# Altium PCB LISC-XC95144XL.PcbDoc
Units mm, origin at the board's own origin, x right, y up, seen from the top; angles counter-clockwise.
Board outline 60 x 50 mm, 2 copper layers (Top Layer, Bottom Layer); 53 components, 82 nets, 315 pads, 102 vias.
Unrouted connection lines stored in the file: 1.
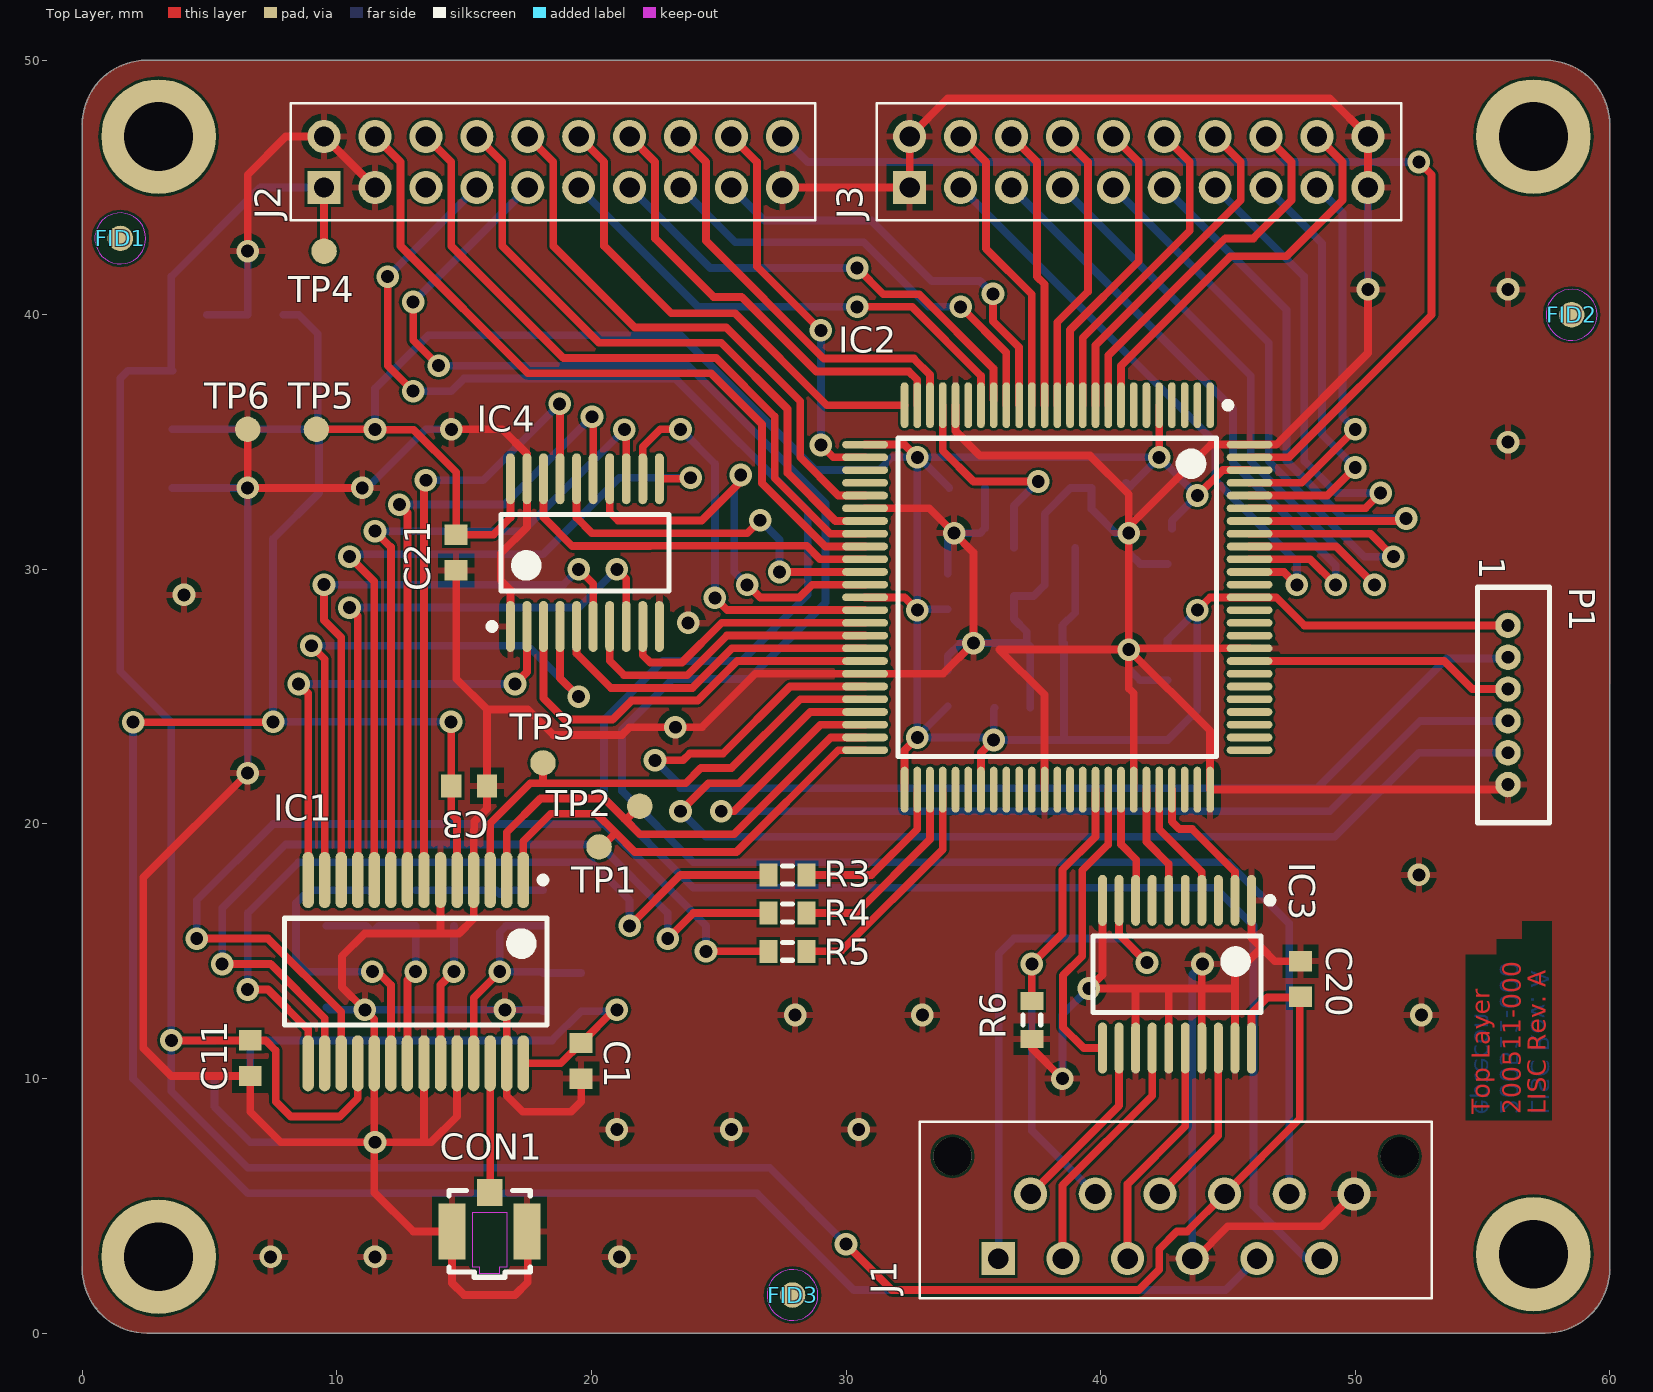
[diagram p0: Top Layer view]
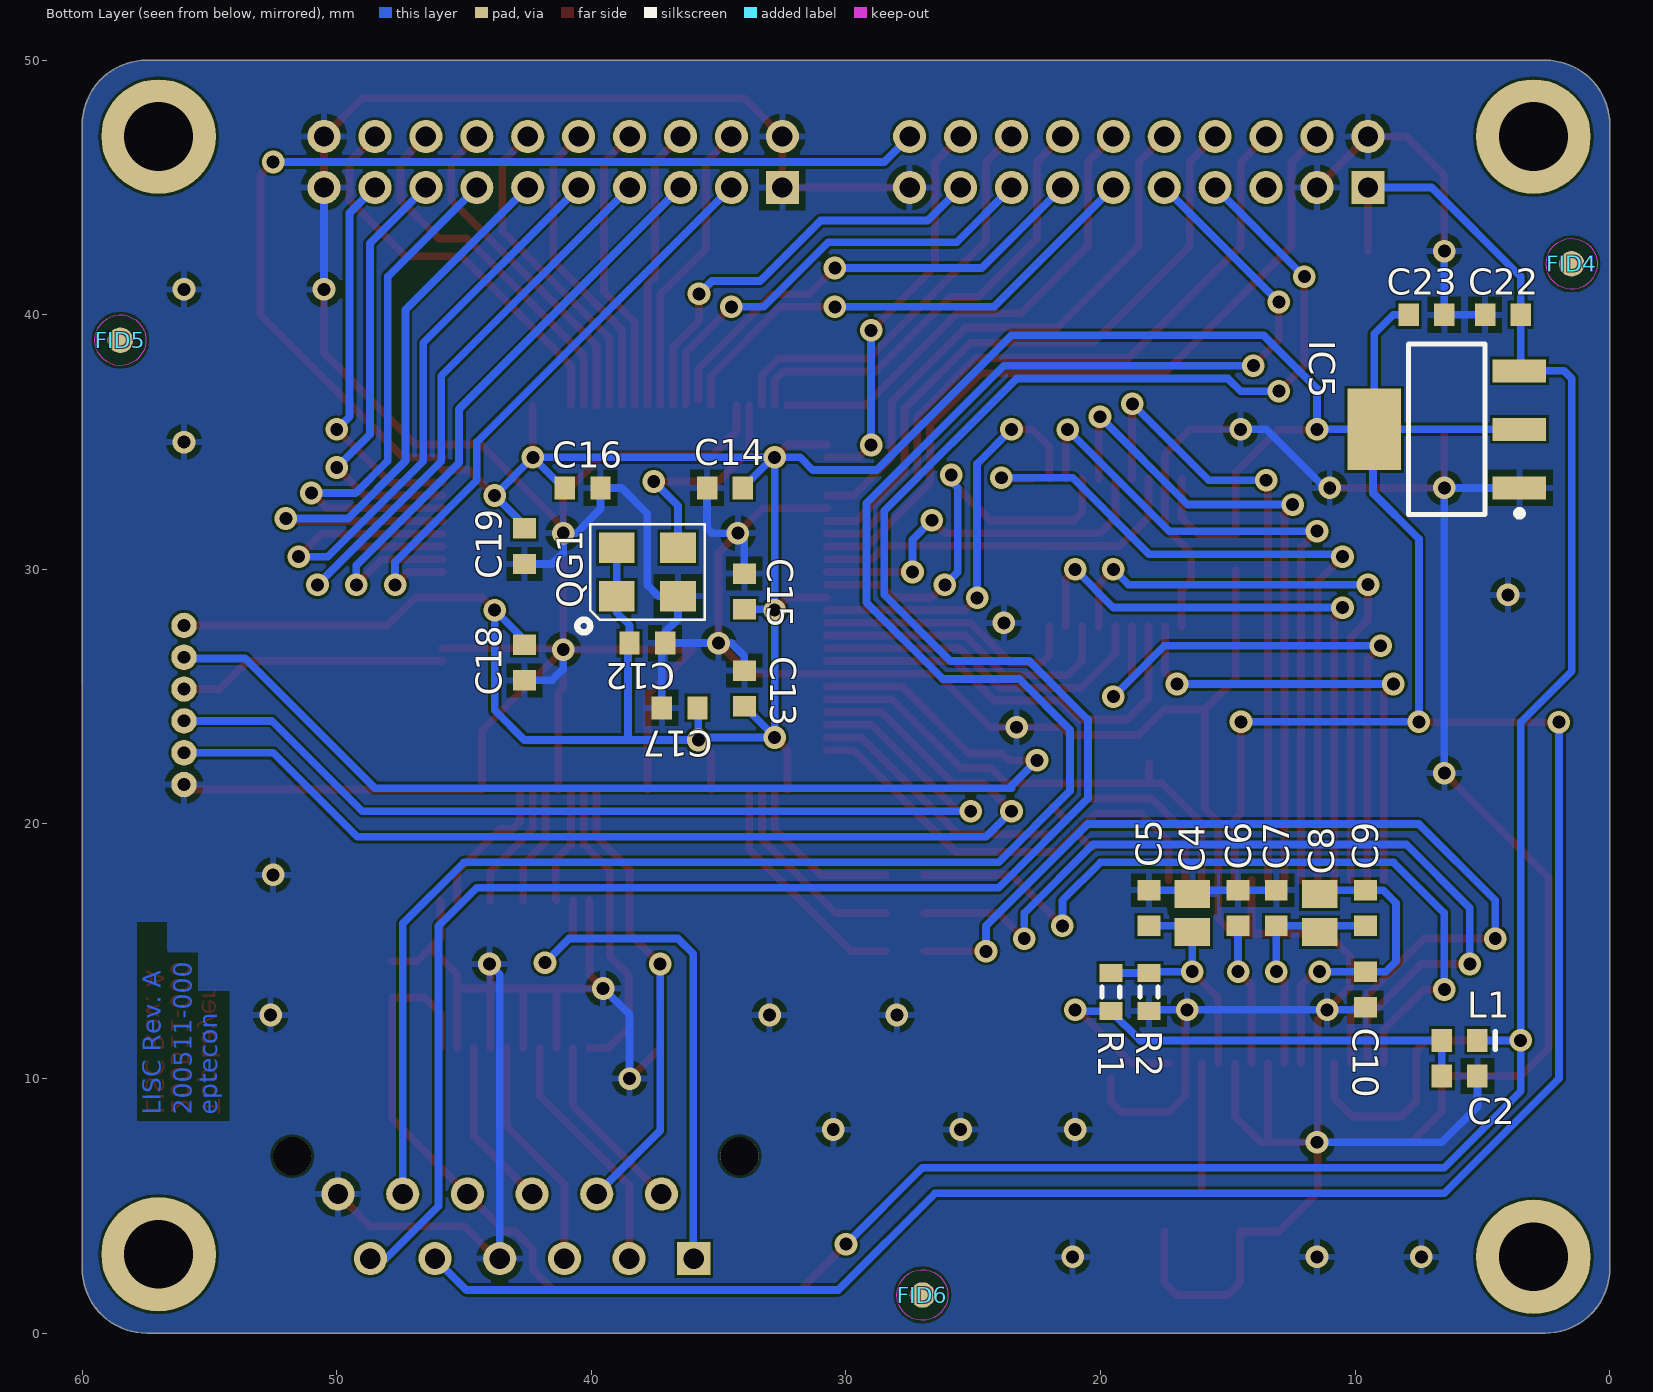
[diagram p1: Bottom Layer view, seen from below]

## Layer stack, top to bottom
Top Solder: solder mask 0.0102, Solder Resist, Dk 3.5
Top Layer: signal copper 0.0356
Dielectric1: dielectric 0.32, FR-4, Dk 4.8
Bottom Layer: signal copper 0.0356
Bottom Solder: solder mask 0.0102, Solder Resist, Dk 3.5

## Board outline
0,3 0,47 0,47.46 cw(c2.54,47.46) 2.54,50 3,50 57.46,50 cw(c57.46,47.46) 60,47.46 60,47 60,2.54 cw(c57.46,2.54) 57.46,0 57,0 2.54,0 cw(c2.54,2.54) 0,2.54 0,3

## Design rules (kind name [scope] priority, off if disabled: settings)
AssemblyTestPointUsage [All] p1: allowmultiple=TRUE
Clearance [All] p1: gap=0.102
Clearance Clearance_1 [All] p2 off: gap=0.102
FabricationTestPointUsage [All] p1: valid=0 allowmultiple=TRUE
HoleSize [All] p1: absolutevalues=TRUE maxlimit=4 minlimit=0.025 maxpercent=80.000 minpercent=20.000
HoleToHoleClearance [All] p1: gap=0.127 allowstackedmicrovias=TRUE
MinimumSolderMaskSliver [All] p1: minsoldermaskwidth=0.025
PolygonConnect [All] p1: connectstyle=Relief reliefconductorwidth=0.254 reliefentries=4 polygonreliefangle="90 Angle" airgapwidth=0.254
RoutingVias [All] p1: holewidth=0.508 width=0.889 viastyle="Through Hole" minholewidth=0.508 minwidth=0.889 maxholewidth=0.508 maxwidth=0.889
SilkToSilkClearance [All] p1: silktosilkclearance=0.025
SilkToSolderMaskClearance SilkscreenOverComponentPads [IsPad] p1: minsilkscreentomaskgap=0.025 clearancetoexposedcopper=TRUE
SolderMaskExpansion [All] p1: expansion=0.102
UnpouredPolygon [All] p1: allowunpoured=FALSE
Width [All] p1: maxlimit=0.305 minlimit=0.305 preferedwidth=0.305
22 further rules are at their usual default settings.

## Classes and differential pairs
net class DIN[0..7]: DIN0 DIN1 DIN2 DIN3 DIN4 DIN5 DIN6 DIN7
net class DB[0..7]: DB0 DB1 DB2 DB3 DB4 DB5 DB6 DB7
net class DA[0..7]: DA0 DA1 DA2 DA3 DA4 DA5 DA6 DA7
net class D[0..7]: D0 D1 D2 D3 D4 D5 D6 D7
component class U_SensorIO: C20 C21 IC3 IC4 J1 R6
component class U_CPLD: C12 C13 C14 C15 C16 C17 C18 C19 IC2 QG1 R3 R4 R5 TP1 TP2 TP3
component class U_AFE: C1 C3 C4 C5 C6 C7 C8 C9 C10 C11 CON1 IC1 L1 R1 R2
component class LISC_TopLevel: C22 C23 IC5 J2 J3 P1 TP4 TP5 TP6

## Components (designator, comment, footprint, x,y, rotation, side; value= is the part's Value field where it differs from the comment)
C1 "10uF/16V" 1608[0603] 19.6,10.7 r270 top
C2 "" 1608[0603] 5.9,10.1 r0 bottom
C3 "Cap Semi" 1608[0603] 15.2,21.5 r0 top
C4 "" C0805 16.4,16.5 r90 bottom
C5 "" 1608[0603] 18.1,16.7 r270 bottom
C6 "" 1608[0603] 14.6,16.7 r270 bottom
C7 "" 1608[0603] 13.1,16.7 r270 bottom
C8 "" C0805 11.4,16.5 r90 bottom
C9 "" 1608[0603] 9.6,16.7 r270 bottom
C10 "" 1608[0603] 9.6,13.5 r90 bottom
C11 "" 1608[0603] 6.6,10.8 r270 top
C12 "Cap Semi" 1608[0603] 37.804,27.104 r0 bottom
C13 "" 1608[0603] 33.994,25.326 r90 bottom
C14 "" 1608[0603] 34.756,33.2 r0 bottom
C15 "" 1608[0603] 33.994,29.136 r90 bottom
C16 "" 1608[0603] 40.344,33.2 r180 bottom
C17 "" 1608[0603] 36.534,24.564 r0 bottom
C18 "" 1608[0603] 42.63,26.342 r270 bottom
C19 "" 1608[0603] 42.63,30.914 r270 bottom
C20 "" 1608[0603] 47.848,13.912 r270 top
C21 "" 1608[0603] 14.69,30.66 r90 top
C22 "" 1608[0603] 4.2,40 r180 bottom
C23 "" 1608[0603] 7.2,40 r0 bottom
CON1 "Coaxial" U.FL-R-SMT 16,4 r180 top
FID1 "Comment" FIDUCIAL_ROUND_1MM 1.5,43 r0 top
FID2 "Comment" FIDUCIAL_ROUND_1MM 58.5,40 r0 top
FID3 "Comment" FIDUCIAL_ROUND_1MM 27.9,1.5 r0 top
FID4 "Comment" FIDUCIAL_ROUND_1MM 1.5,42 r180 bottom
FID5 "Comment" FIDUCIAL_ROUND_1MM 58.5,39 r180 bottom
FID6 "Comment" FIDUCIAL_ROUND_1MM 27,1.5 r180 bottom
IC1 "AD9826" SOP65P780-28AM 13.1,14.2 r270 top
IC2 "XC95144XL-7TQG100C" TQG100_N 38.3,28.9 r270 top
IC3 "SN74AHCT244PW" PW020_M 43,14.1 r270 top
IC4 "SN74LVC244APW" PW020_M 19.744,30.658 r90 top
IC5 "ADP3338" SOT223-4L 6.4,35.5 r0 bottom
J1 "Header" Molex_Picoflex_12 43.6,4.2 r0 top
J2 "M22-7141042" PCBComponent_1 18.5,46 r0 top
J3 "M22-7141042" PCBComponent_1 41.5,46 r0 top
L1 "FB" INDC1608L 5.9,11.5 r0 bottom
P1 "Steckv. Picoblade, Header, 6pol" "PicoBlade Header 6Pin gerade" 56,27.8 r270 top
QG1 "SG-310 SCF C 48.0MHZ" SG-310_Series 37.8,29.9 r180 bottom
R1 "" J1-0603 19.6,13.4 r90 bottom
R2 "" J1-0603 18.1,13.4 r270 bottom
R3 "" J1-0603 27.7,18 r180 top
R4 "" J1-0603 27.7,16.5 r180 top
R5 "" J1-0603 27.7,15 r180 top
R6 "" J1-0603 37.3,12.3 r90 top
TP1 "TP_SMD" TP100_200_NS 20.3,19.1 r90 top
TP2 "TP_SMD" TP100_200_NS 21.9,20.7 r90 top
TP3 "TP_SMD" TP100_200_NS 18.1,22.4 r90 top
TP4 "TP_SMD" TP100_200_NS 9.5,42.5 r90 top
TP5 "TP_SMD" TP100_200_NS 9.2,35.5 r90 top
TP6 "TP_SMD" TP100_200_NS 6.5,35.5 r90 top

## Footprints (in the part's own frame and the unit in brackets; to place one, negate y for a bottom-side part, rotate by r counter-clockwise, add the part's x,y. Pads: shape width x height; smd on the part's side, far side on the other; paste and mask are expansions set on the pad)
1608[0603] [mm] "Chip Capacitor, Body 1.6x0.8mm, IPC High Density"
  rect 0.8x0.9 smd: 1(-0.7,0) 2(0.7,0)
  body extent -0.87,-0.48 0.87,0.48, height 1.3
C0805 [mm] "Chip Capacitor, Body 2.0x1.3mm, IPC High Density"
  rect 1.1x1.4 smd: 1(-0.75,0) 2(0.75,0)
  body extent -1.1,-0.72 1.1,0.72, height 1.4
FIDUCIAL_ROUND_1MM [mm] "Round, 1mm dia"
  round 1 smd paste-1 mask+0.5: 1(0,0)
  Top Layer keep-out circle w0.025: c0,0 r1
INDC1608L [mm] "Chip Inductor, Body 1.6x0.8mm, IPC High Density"
  rect 0.8x0.9 smd: 1(-0.7,0) 2(0.7,0)
  silkscreen extent -1.4,-0.35 -1.4,0.35, body extent -0.87,-0.48 0.87,0.48, height 0.55
J1-0603 [mm] "Chip Resistor, Body 1.6x0.8mm, IPC High Density"
  rect 0.7x0.9 smd: 1(-0.75,0) 2(0.75,0)
  silkscreen extent -0.2,-0.35 0.2,0.35, body extent -0.85,-0.48 0.85,0.48, height 0.9
Molex_Picoflex_12 [mm]
  round 1.3 hole 0.8: 1(6.35,1.27) 2(5.08,-1.27) 3(3.81,1.27) 4(2.54,-1.27) 5(1.27,1.27) 6(0,-1.27) 7(-1.27,1.27) 8(-2.54,-1.27) 9(-3.81,1.27) 10(-5.08,-1.27) 11(-6.35,1.27)
  rect 1.3x1.3 hole 0.8: 12(-7.62,-1.27)
  round 1.5 hole 1.5 unplated: ""(-9.42,2.75) ""(8.15,2.75)
  silkscreen extent -10.7,-2.83 9.4,4.11, body extent -10.34,-2.68 9.14,3.48, height 6.4
PCBComponent_1 [mm]
  rect 1.3x1.3 hole 0.8: 1(-9,-1)
  round 1.3 hole 0.8: 2(-9,1) 3(-7,-1) 4(-7,1) 5(-5,-1) 6(-5,1) 7(-3,-1) 8(-3,1) 9(-1,-1) 10(-1,1) 11(1,-1) 12(1,1) 13(3,-1) 14(3,1) 15(5,-1) 16(5,1) 17(7,-1) 18(7,1) 19(9,-1) 20(9,1)
  silkscreen extent -10.3,-2.29 10.3,2.3
"PicoBlade Header 6Pin gerade" [mm] "Steckv. PicoBlade Header 6polig gerade"
  round 1 hole 0.5: 1(0,0) 2(1.25,0) 3(2.5,0) 4(3.75,0) 5(5,0) 6(6.25,0)
  silkscreen extent -1.5,-1.2 7.75,1.63, body extent -1.5,-1.12 7.75,2.08, height 4.2
PW020_M [mm] "TSOP, 20-Leads, Body 6.5x4.4mm, Pitch 0.65mm, IPC Low Density"
  oval 2x0.35 smd: 1(-2.9,2.925) 2(-2.9,2.275) 3(-2.9,1.625) 4(-2.9,0.975) 5(-2.9,0.325) 6(-2.9,-0.325) 7(-2.9,-0.975) 8(-2.9,-1.625) 9(-2.9,-2.275) 10(-2.9,-2.925) 11(2.9,-2.925) 12(2.9,-2.275) 13(2.9,-1.625) 14(2.9,-0.975) 15(2.9,-0.325) 16(2.9,0.325) 17(2.9,0.975) 18(2.9,1.625) 19(2.9,2.275) 20(2.9,2.925)
  silkscreen extent -3.02,-3.3 1.5,3.78, body extent -2.25,-3.3 2.25,3.3, height 1.2
SG-310_Series [mm]
  rect 1.4x1.2 smd: 1(-1.2,-0.95) 2(1.2,-0.95) 3(1.2,0.95) 4(-1.2,0.95)
  silkscreen extent -2.75,-2.37 2.25,1.88, body extent -1.7,-1.35 1.7,1.35, height 1
SOP65P780-28AM [mm] "SOP, 28-Leads, Body 10.2x5.3mm, Pitch 0.65mm, IPC Low Density"
  oval 2.2x0.45 smd: 1(-3.6,4.225) 2(-3.6,3.575) 3(-3.6,2.925) 4(-3.6,2.275) 5(-3.6,1.625) 6(-3.6,0.975) 7(-3.6,0.325) 8(-3.6,-0.325) 9(-3.6,-0.975) 10(-3.6,-1.625) 11(-3.6,-2.275) 12(-3.6,-2.925) 13(-3.6,-3.575) 14(-3.6,-4.225) 15(3.6,-4.225) 16(3.6,-3.575) 17(3.6,-2.925) 18(3.6,-2.275) 19(3.6,-1.625) 20(3.6,-0.975) 21(3.6,-0.325) 22(3.6,0.325) 23(3.6,0.975) 24(3.6,1.625) 25(3.6,2.275) 26(3.6,2.925) 27(3.6,3.575) 28(3.6,4.225)
  silkscreen extent -3.72,-5.15 2.1,5.15, body extent -2.69,-5.17 2.69,5.17, height 1.98
SOT223-4L [mm] "SOT223, 4-Leads, Body 6.5x3.5mm, Pitch 2.3mm, Lead Span 7mm, IPC High Density"
  rect 2.1x0.9 smd: 1(-2.85,2.3) 2(-2.85,0) 3(-2.85,-2.3)
  rect 2.1x3.2 smd: 4(2.85,0)
  silkscreen extent -2.97,-3.35 1.5,3.42, body extent -1.85,-3.35 1.85,3.35, height 1.8
TP100_200_NS [mm] "1mm dia pad, 2mm dia clearance, no silk screen"
  round 1 smd paste-2: 1(0,0)
TQG100_N [mm] "Thin QFP, 100-Leads, Body 14x14mm, Pitch 0.5mm, IPC Medium Density"
  oval 1.8x0.3 smd: 1(-7.55,6) 2(-7.55,5.5) 3(-7.55,5) 4(-7.55,4.5) 5(-7.55,4) 6(-7.55,3.5) 7(-7.55,3) 8(-7.55,2.5) 9(-7.55,2) 10(-7.55,1.5) 11(-7.55,1) 12(-7.55,0.5) 13(-7.55,0) 14(-7.55,-0.5) 15(-7.55,-1) 16(-7.55,-1.5) 17(-7.55,-2) 18(-7.55,-2.5) 19(-7.55,-3) 20(-7.55,-3.5) 21(-7.55,-4) 22(-7.55,-4.5) 23(-7.55,-5) 24(-7.55,-5.5) 25(-7.55,-6) 51(7.55,-6) 52(7.55,-5.5) 53(7.55,-5) 54(7.55,-4.5) 55(7.55,-4) 56(7.55,-3.5) 57(7.55,-3) 58(7.55,-2.5) 59(7.55,-2) 60(7.55,-1.5) 61(7.55,-1) 62(7.55,-0.5) 63(7.55,0) 64(7.55,0.5) 65(7.55,1) 66(7.55,1.5) 67(7.55,2) 68(7.55,2.5) 69(7.55,3) 70(7.55,3.5) 71(7.55,4) 72(7.55,4.5) 73(7.55,5) 74(7.55,5.5) 75(7.55,6)
  oval 0.3x1.8 smd: 26(-6,-7.55) 27(-5.5,-7.55) 28(-5,-7.55) 29(-4.5,-7.55) 30(-4,-7.55) 31(-3.5,-7.55) 32(-3,-7.55) 33(-2.5,-7.55) 34(-2,-7.55) 35(-1.5,-7.55) 36(-1,-7.55) 37(-0.5,-7.55) 38(0,-7.55) 39(0.5,-7.55) 40(1,-7.55) 41(1.5,-7.55) 42(2,-7.55) 43(2.5,-7.55) 44(3,-7.55) 45(3.5,-7.55) 46(4,-7.55) 47(4.5,-7.55) 48(5,-7.55) 49(5.5,-7.55) 50(6,-7.55) 76(6,7.55) 77(5.5,7.55) 78(5,7.55) 79(4.5,7.55) 80(4,7.55) 81(3.5,7.55) 82(3,7.55) 83(2.5,7.55) 84(2,7.55) 85(1.5,7.55) 86(1,7.55) 87(0.5,7.55) 88(0,7.55) 89(-0.5,7.55) 90(-1,7.55) 91(-1.5,7.55) 92(-2,7.55) 93(-2.5,7.55) 94(-3,7.55) 95(-3.5,7.55) 96(-4,7.55) 97(-4.5,7.55) 98(-5,7.55) 99(-5.5,7.55) 100(-6,7.55)
  silkscreen extent -7.67,-6.25 6.25,6.83, body extent -7,-7 7,7, height 1.6
U.FL-R-SMT [mm]
  rect 1x1.05 smd: 1(0,-1.525)
  rect 1.05x2.2 smd: 2(-1.475,0) 2(1.475,0)
  Top Layer keep-out region: -0.686,-0.737 0.686,-0.737 0.686,1.397 0.406,1.397 0.406,1.651 -0.406,1.651 -0.406,1.397 -0.686,1.397
  silkscreen extent -1.6,-1.6 1.6,1.8, body extent -1.5,-1.55 1.5,1.55, height 1.25

## Part data
C1: library part "Cap EU SMD Pol", "Polarized Capacitor (Surface Mount)"
C2 C5 C6 C7 C9 C10 C11 C13 C14 C15 C16 C17 C18 C19 C20 C21 C22 C23: library part "Cap Semi", "Capacitor (Semiconductor SIM Model)"
C3 C12: "Capacitor (Semiconductor SIM Model)"
C4 C8: library part "Cap Pol3", "Polarized Capacitor (Surface Mount)"
IC2: "FastFLASH XC900XL, 3.3V High-Performance CPLD with 144 Macrocells, 100-Pin TQFP, Commercial Grade, Pb-Free"
IC3: library part SN74AHCT244PWLE, "Octal Buffer/Driver with 3-State Outputs"
IC4: "Octal Buffer/Driver with 3-State Outputs"
IC5: "High Accuracy, Ultralow IQ, 1 A,  anyCAP® Low Dropout Regulator"
J1: "Molex Picoflex 12pol."
J2 J3: "Harwig M22-7141042"
L1: library part Inductor, "Inductor"
P1: library part "1.25mm Pitch PicoBlade™ Wire-to-Board Header, Vertical, with Friction Lock, 6 Circuits", "MOLEX - 53047-0610 - STECKER,VERTIKAL,6KONT"
QG1: library part "SG-310 SCF C 20.0MHZ", "EPSON TOYOCOM - SG-310 SCF C 20.0MHZ - OSZILLATOR, SM 3,2X2,5MM 20,0MHZ"
R1 R2 R3 R4 R5 R6: library part Res3, "Resistor"

## Free pads (board coordinates)
  round 4.5 hole 2.7: 1(57,3.1) 2(3,3) 3(3,47) 4(57,47)

## Via types
v1: diameter 0.889, hole 0.508, Top Layer to Bottom Layer, 102 vias

## Nets (pads, with @x,y where several pads share a name; then routed paths per layer and width w, separated by ;. In a path a pad name is that pad's centre, name@x,y a point inside that pad or via, vN(x,y) a via of type N, cw(c..) or ccw(c..) an arc to the next point about the centre after c; other vN are vias at no path point)
3V: J2.5
3V3: C3.1 C12.2 C13.1 C14.1 C15.1 C16.1 C17.1 C18.1 C19.1 C21.2 C23.2 IC1.5 IC2.5 IC2.26 IC2.38 IC2.51 IC2.57 IC2.88 IC2.98 IC4.20 IC5.2 IC5.4 J1.4 P1.1 QG1.1 QG1.4 TP5.1 | length 228.7
  Top Layer w0.305: v1(2,24) 7.486,24 v1(7.5,24.014) ; TP5.1 v1(11.5,35.5) 11.514,35.486 13.014,35.486 14.69,33.81 C21.2 16.152,31.36 16.819,32.027 IC4.20 ; v1@14.5,24 C3.1 14.5,20.4 14.725,20.175 IC1.5 ; IC2.38 32.3,28.9 v1(32.8,28.4) ; IC2.26 32.3,34.9 v1(32.8,34.4) ; IC2.51 32.3,22.9 v1(32.8,23.4) ; IC2.57 35.3,22.8 v1(35.8,23.3) ; v1(42.3,34.4) IC2.5 ; v1(43.8,28.4) 44.3,28.9 IC2.88 46.9,28.9 48,27.8 P1.1 ; v1(43.8,32.9) 44.8,33.9 IC2.98 IC2.98@45.855,33.905
  Bottom Layer w0.305: v1(2,24) 2,10 6.5,5.5 26.5,5.5 30.3,1.7 44.91,1.7 J1.4 ; IC5.2 IC5.4 ; C23.2 8.5,40 9.25,39.25 IC5.4 ; v1(14.486,24.014) v1(7.5,24.014) 7.5,31.2 9.3,33 9.3,35.45 IC5.4 ; C13.1 v1@32.8,23.432 ; C15.1 32.978,28.436 32.942,28.4 v1(32.8,28.4) ; C14.1 v1@32.856,34.4 ; C17.1 35.8,24.53 v1(35.8,23.3) ; QG1.4 QG1.1 39,28.3 38.5,27.8 38.5,27.1 38.566,27.1 38.566,23.3 ; C16.1@41,33.4 41.15,33.25 v1(42.3,34.4) ; C18.1 42.63,27.23 v1(43.8,28.4) 43.8,24.464 42.636,23.3 38.566,23.3 ; C19.1@42.8,31.6 42.8,31.9 v1(43.8,32.9) v1(42.3,34.4) ; IC5.4 v1(11.5,35.5) 11.5,37.1 13.6,39.2 23.5,39.2 28.8,33.9 31.3,33.9 31.8,34.4 v1(32.8,34.4) ; v1@32.8,23.432 v1(32.8,28.4) ; v1@32.8,23.432 v1(32.8,23.4) 35.7,23.4 v1(35.8,23.3) ; v1(32.8,28.4) v1(32.8,34.4) ; v1(32.8,34.4) v1@32.856,34.4 ; v1@32.856,34.4 v1(42.3,34.4) ; v1(35.8,23.3) 38.566,23.3
5V: C11.1 C20.2 C22.2 IC1.18 IC3.20 IC5.3 J1.5 J2.1 L1.1 TP4.1 | length 116.8
  Top Layer w0.305: v1(3.5,11.5) C11.1@6.5,11.5 ; C11.1 7.2,11.5 7.6,11.1 7.6,9.1 8.188,8.512 10.112,8.512 10.825,9.225 IC1.18 ; TP4.1 J2.1 ; v1(30,3.5) 31.8,1.7 41.5,1.7 42.3,2.5 42.3,3.3 43,4 43.4,4 J1.5 47.819,8.419 47.819,13.183 46.545,13.183 45.925,12.563 IC3.20
  Bottom Layer w0.305: L1.1 v1(3.5,11.5) ; J2.1 7,45 3.5,41.5 C22.2 3.5,37.85 IC5.3 1.8,37.8 1.5,37.5 1.5,26 3.5,24 v1(3.5,11.5) ; v1(30,3.5) 27,6.5 6.5,6.5 3.5,9.5 v1(3.5,11.5)
5V-A: C1.1 C2.2 IC1.28 L1.2 R1.1 | length 20.8
  Top Layer w0.305: IC1.28 18.8,10.6 C1.1 20.9,12.7 v1(21,12.7)
  Bottom Layer w0.305: C2.2 L1.2 18.45,11.5 R1.1 20.95,12.65 v1(21,12.7)
ADCCLK: IC1.3 IC2.46 TP3.1 | length 19.8
  Top Layer w0.305: IC1.3 16.025,20.025 17.6,21.6 18.1,21.6 ; TP3.1 18.1,21.6 ; IC2.46 28.2,24.9 25.5,22.2 24.3,22.2 23.7,21.6 18.1,21.6
ADCSCLK: IC1.16 R4.2 | length 33.9
  Top Layer w0.305: v1(5.5,14.5) 7.4,14.5 9.525,12.375 IC1.16 ; v1(23,15.5) 24,16.5 R4.2
  Bottom Layer w0.305: v1(5.5,14.5) 5.5,16.7 8,19.2 20.3,19.2 23,16.5 v1(23,15.5)
ADCSDATA: IC1.15 R3.2 | length 31.1
  Top Layer w0.305: v1(6.5,13.5) 7.3,13.5 8.875,11.925 IC1.15 ; v1(21.5,16) 23.5,18 R3.2
  Bottom Layer w0.305: v1(6.5,13.5) 6.5,16.5 8.5,18.5 20,18.5 21.5,17 v1(21.5,16)
ADCSLOAD: IC1.17 R5.2 | length 36.7
  Top Layer w0.305: v1(4.5,15.5) 7.3,15.5 10.175,12.625 IC1.17 ; v1(24.5,15) R5.2
  Bottom Layer w0.305: v1(4.5,15.5) 4.5,17 7.5,20 20.5,20 24.5,16 v1(24.5,15)
ADCTRIG: IC2.66 J1.9 R6.2 | length 19.4
  Top Layer w0.305: R6.2 v1(37.3,14.5) 38.5,15.7 38.5,18.2 39.8,19.5 IC2.66
  Bottom Layer w0.305: v1(37.3,14.5) 37.3,7.96 J1.9
CDSCLK1: IC1.1 IC2.50 TP1.1 | length 18.6
  Top Layer w0.305: IC1.1 17.325,19.325 18.4,20.4 20.2,20.4 20.95,19.65 ; TP1.1 20.4,19.1 20.95,19.65 ; IC2.50 29.7,22.9 25.7,18.9 21.7,18.9 20.95,19.65
CDSCLK2: IC1.2 IC2.49 TP2.1 | length 19.5
  Top Layer w0.305: IC1.2 16.675,19.675 18,21 20.5,21 21.3,20.2 ; TP2.1 21.4,20.2 21.3,20.2 ; IC2.49 29.4,23.4 25.6,19.6 21.9,19.6 21.3,20.2
CLK: IC2.22 QG1.3 | length 9
  Top Layer w0.305: IC2.22 33.8,34.664 35.01,33.454 v1(37.55,33.454)
  Bottom Layer w0.305: QG1.3 36.6,32.504 v1(37.55,33.454)
CS: IC2.30 J2.10 | length 22.3
  Top Layer w0.305: J2.10 18.5,46 18.5,42.7 21.7,39.5 25.3,39.5 28.2,36.6 28.2,34.4 29.7,32.9 IC2.30
D0: IC1.14 IC4.2 | length 18.8
  Top Layer w0.305: v1(8.5,25.5) 8.875,25.125 IC1.14 ; v1(17,25.5) 17.469,25.969 IC4.2
  Bottom Layer w0.305: v1(8.5,25.5) v1(17,25.5)
D1: IC1.13 IC4.4 | length 23.8
  Top Layer w0.305: v1(9,27) 9.525,26.475 IC1.13 ; IC4.4 18.769,25.731 v1(19.5,25)
  Bottom Layer w0.305: v1(9,27) 17.5,27 v1(19.5,25)
D2: IC1.12 IC4.6 | length 24.6
  Top Layer w0.305: v1(9.5,29.4) 9.5,28 10.175,27.325 IC1.12 ; v1(19.5,30) 20.069,29.431 IC4.6
  Bottom Layer w0.305: v1(9.5,29.4) 18.9,29.4 v1(19.5,30)
D3: IC1.11 IC4.8 | length 24.4
  Top Layer w0.305: v1(10.5,28.5) 10.825,28.175 IC1.11 ; v1(21,30) 21.369,29.631 IC4.8
  Bottom Layer w0.305: v1(10.5,28.5) 19.5,28.5 v1(21,30)
D4: IC1.10 IC4.11 | length 29
  Top Layer w0.305: v1(10.5,30.5) 11.475,29.525 IC1.10 ; IC4.11 23.858,33.558 v1(23.9,33.6)
  Bottom Layer w0.305: v1(10.5,30.5) 10.597,30.597 18.097,30.597 21.1,33.6 v1(23.9,33.6)
D5: IC1.9 IC4.13 | length 27.4
  Top Layer w0.305: v1(11.5,31.5) 12.125,30.875 IC1.9 ; v1(21.294,35.486) 21.369,35.411 IC4.13
  Bottom Layer w0.305: v1(11.5,31.5) 17.308,31.5 v1(21.294,35.486)
D6: IC1.8 IC4.15 | length 26.3
  Top Layer w0.305: v1(12.455,32.545) 12.775,32.225 IC1.8 ; v1(20.024,35.994) 20.069,35.949 IC4.15
  Bottom Layer w0.305: v1(12.455,32.545) 16.575,32.545 v1(20.024,35.994)
D7: IC1.7 IC4.17 | length 25.2
  Top Layer w0.305: IC1.7 13.425,33.425 v1(13.5,33.5) ; v1(18.754,36.502) 18.769,36.487 IC4.17
  Bottom Layer w0.305: v1(13.5,33.5) 15.752,33.5 v1(18.754,36.502)
DA0: IC2.15 J3.4 | length 11.7
  Top Layer w0.305: J3.4 35.5,46 35.5,42.6 37.3,40.8 IC2.15
DA1: IC2.14 J3.6 | length 11.1
  Top Layer w0.305: J3.6 37.5,46 37.5,41.5 37.8,41.2 IC2.14
DA2: IC2.13 J3.8 | length 11.5
  Top Layer w0.305: IC2.13 38.3,39.7 39.5,40.9 39.5,46 J3.8
DA3: IC2.12 J3.10 | length 12.1
  Top Layer w0.305: IC2.12 38.8,39.4 41.5,42.1 41.5,46 J3.10
DA4: IC2.11 J3.12 | length 12.7
  Top Layer w0.305: IC2.11 39.3,39.1 43.5,43.3 43.5,46 J3.12
DA5: IC2.10 J3.14 | length 13.3
  Top Layer w0.305: IC2.10 39.8,38.8 45.5,44.5 45.5,46 J3.14
DA6: IC2.9 J3.16 | length 14.6
  Top Layer w0.305: IC2.9 40.3,38.4 44.9,43 46,43 47.5,44.5 47.5,46 J3.16
DA7: IC2.8 J3.18 | length 15.9
  Top Layer w0.305: IC2.8 40.8,38 45.1,42.3 47.3,42.3 49.5,44.5 49.5,46 J3.18
DB0: IC2.90 J3.3 | length 23.2
  Top Layer w0.305: IC2.90 47.2,29.9 v1(47.709,29.391)
  Bottom Layer w0.305: J3.3 44.5,35 44.5,33.5 47.709,30.291 v1(47.709,29.391)
DB1: IC2.91 J3.5 | length 24.7
  Top Layer w0.305: IC2.91 48.224,30.4 v1(49.234,29.39)
  Bottom Layer w0.305: J3.5 45.2,36.3 45.2,34.186 49.234,30.152 v1(49.234,29.39)
DB2: IC2.92 J3.7 | length 26.2
  Top Layer w0.305: IC2.92 49.248,30.9 v1(50.758,29.39)
  Bottom Layer w0.305: J3.7 45.9,37.6 45.9,34.248 v1(50.758,29.39)
DB3: IC2.93 J3.9 | length 25.8
  Top Layer w0.305: IC2.93 50.6,31.4 v1(51.5,30.5)
  Bottom Layer w0.305: J3.9 46.6,38.9 46.6,34.252 50.352,30.5 v1(51.5,30.5)
DB4: IC2.94 J3.11 | length 24.6
  Top Layer w0.305: IC2.94 51.9,31.9 v1(52,32)
  Bottom Layer w0.305: J3.11 47.3,40.2 47.3,34.256 49.556,32 v1(52,32)
DB5: IC2.95 J3.13 | length 21.1
  Top Layer w0.305: IC2.95 50.4,32.4 v1(51,33)
  Bottom Layer w0.305: J3.13 48,41.5 48,34.26 49.26,33 v1(51,33)
DB6: IC2.96 J3.15 | length 17.1
  Top Layer w0.305: IC2.96 48.9,32.9 v1(50,34)
  Bottom Layer w0.305: J3.15 48.7,42.8 48.7,35.3 v1(50,34)
DB7: IC2.97 J3.17 | length 15.1
  Top Layer w0.305: IC2.97 47.9,33.4 v1(50,35.5)
  Bottom Layer w0.305: J3.17 49.5,44 49.5,36 v1(50,35.5)
DIN0: IC2.35 IC4.18 | length 14.8
  Top Layer w0.305: IC4.18 18.119,32.047 19.252,30.914 22.3,30.914 22.31,30.924 28.454,30.924 28.978,30.4 IC2.35
DIN1: IC2.36 IC4.16 | length 14.9
  Top Layer w0.305: IC4.16 19.419,32.027 20.024,31.422 26.12,31.422 v1(26.628,31.93) ; v1(27.39,29.898) 28.66,29.898 28.662,29.9 IC2.36
  Bottom Layer w0.305: v1(26.628,31.93) 27.39,31.168 v1(27.39,29.898)
DIN2: IC2.37 IC4.14 | length 17.9
  Top Layer w0.305: IC4.14 20.719,32.251 21.05,31.92 24.332,31.92 26.12,33.708 v1(25.866,33.708) ; v1(26.12,29.39) 26.136,29.39 26.628,28.898 28.168,28.898 28.67,29.4 IC2.37
  Bottom Layer w0.305: v1(25.866,33.708) 26.12,33.708 25.612,33.2 25.612,29.898 v1(26.12,29.39)
DIN3: IC2.39 IC4.12 | length 16.3
  Top Layer w0.305: IC4.12 22.019,34.819 22.7,35.5 v1(23.5,35.5) ; v1(24.85,28.882) 25.332,28.4 IC2.39
  Bottom Layer w0.305: v1(23.5,35.5) 24.85,34.15 v1(24.85,28.882)
DIN4: IC2.40 IC4.9 | length 10.6
  Top Layer w0.305: IC4.9 22.019,26.633 22.31,26.342 23.558,26.342 25.116,27.9 IC2.40
DIN5: IC2.41 IC4.7 | length 12.3
  Top Layer w0.305: IC4.7 20.719,26.409 21.284,25.844 23.764,25.844 25.32,27.4 IC2.41
DIN6: IC2.42 IC4.5 | length 13.6
  Top Layer w0.305: IC4.5 19.419,26.693 20.766,25.346 23.97,25.346 25.524,26.9 IC2.42
DIN7: IC2.43 IC4.3 | length 16.7
  Top Layer w0.305: IC4.3 18.119,24.945 18.964,24.1 20.83,24.1 21.579,24.849 24.177,24.849 25.728,26.4 IC2.43
EXTCLK: IC2.23 J2.16 | length 16.7
  Top Layer w0.305: J2.16 24.5,46 24.5,42.911 29.131,38.28 32.666,38.28 33.298,37.648 33.298,36.452 IC2.23
GND: C1.2 C2.1 C3.2 C4.2 C5.1 C6.1 C7.1 C10.1 C11.2 C12.1 C13.2 C14.2 C15.2 C16.2 C17.2 C18.2 C19.2 C20.1 C21.1 C22.1 C23.1 CON1.2 IC1.4 IC1.6 IC1.19 IC1.22 IC1.24 IC1.27 IC2.21 IC2.31 IC2.44 IC2.62 IC2.69 IC2.75 IC2.84 IC2.100 IC3.1 IC3.10 IC3.13 IC3.15 IC3.17 IC3.19 IC4.1 IC4.10 IC4.19 IC5.1 J1.1 J1.6 J2.2 J2.3 J2.19 J3.1 J3.2 J3.19 J3.20 P1.6 QG1.2 R2.2 R6.1 TP6.1 | length 364.2
  Top Layer w0.305: v1(6.5,22) 2.4,17.9 2.4,11.2 3.5,10.1 C11.2 6.6,8.7 7.8,7.5 v1@11.475,7.5 ; TP6.1 v1(6.5,33.2) v1(11,33.2) ; v1(6.5,42.5) 6.5,45.5 8,47 J2.2 J2.3 ; v1(11.5,7.5) 13.4,7.5 ; IC1.22 13.425,7.525 13.4,7.5 ; IC1.6 14.075,15.775 14,15.7 ; v1(14.5,35.5) 16.5,35.5 17.469,34.531 IC4.19 17.469,31.661 16.44,30.632 16.44,29.571 16.819,29.192 IC4.1 ; C21.1 14.69,25.71 15.9,24.5 ; IC1.24 14.725,8.525 13.7,7.5 13.4,7.5 ; v1(16.6,12.7) 16.675,12.625 IC1.27 16.675,9.325 17.3,8.7 19.2,8.7 19.6,9.1 C1.2 ; CON1.2@17.475,4 17.5,3.975 17.5,2 17,1.5 15,1.5 14.525,1.975 14.525,4 13,4 11.475,5.525 v1@11.475,7.5 ; J2.19 J3.1 J3.2 34,48.5 49,48.5 J3.20 J3.19 ; IC2.31 33.27,32.4 v1(34.248,31.422) 35.01,30.66 v1(35.01,27.104) 33.806,25.9 IC2.44 26.44,25.9 24.34,23.8 v1(23.3,23.8) 21.5,23.8 21.2,23.5 18.5,23.5 17.5,24.5 15.9,24.5 ; IC2.21 34.3,35.434 35.264,34.47 39.582,34.47 41.106,32.946 v1@41.106,31.676 ; R6.1 37.3,11.2 v1(38.5,10) ; IC2.62 37.8,25.076 36.026,26.85 v1(41.106,26.85) ; IC3.10 40.075,14.079 v1(39.536,13.54) 42.584,13.54 ; IC2.69 41.3,25.132 41.106,25.326 v1(41.106,26.85) ; IC3.13 41.375,13.479 ; IC3.15 42.675,13.449 42.584,13.54 ; J1.6 43.73,2.93 45,4.2 48.68,4.2 J1.1 ; IC3.17 43.975,13.54 ; v1(44,14.5) 43.975,14.475 43.975,13.54 ; IC3.19 45.275,13.54 ; IC2.84 41.156,26.9 v1(41.106,26.85) ; IC3.1 45.925,15.533 46.317,15.14 ; C20.1 46.846,14.612 46.317,15.14 ; v1(50.5,41) 50.5,38.5 46.9,34.9 IC2.100 44.33,34.9 v1@41.106,31.676 ; P1.6 55.8,21.35 IC2.75 44.3,23.656 v1(41.106,26.85) ; v1@11.475,7.5 IC1.19 11.475,12.325 v1(11.1,12.7) 10.2,13.6 10.2,14.8 11.1,15.7 14,15.7 ; 14,15.7 14.8,15.7 15.375,16.275 IC1.4 15.375,19.775 15.4,19.8 15.4,20.1 15.9,20.6 C3.2 15.9,24.5 ; v1(41.106,26.85) v1(41.106,31.422) v1@41.106,31.676 ; 42.584,13.54 43.975,13.54 ; 43.975,13.54 45.275,13.54 ; 45.275,13.54 45.275,14.098 46.317,15.14
  Bottom Layer w0.305: IC5.1 v1(6.5,33.2) v1(6.5,22) ; C22.1 C23.1 v1(6.5,42.5) ; C2.1 5.2,8.9 6.6,7.5 v1(11.5,7.5) ; C10.1 9.7,12.7 v1(11.1,12.7) v1(16.6,12.7) 18.05,12.7 R2.2 ; v1(11,33.2) 11.2,33.2 13.5,35.5 v1(14.5,35.5) ; C7.1 C6.1 16.25,17.4 C4.2 16.55,17.4 C5.1 ; C13.2 33.994,26.596 34.502,27.104 ; C15.2 33.994,31.168 v1(34.248,31.422) 35.264,31.422 35.456,31.614 C14.2 ; v1(35.01,27.104) C12.1@37.1,27.104 ; C17.2 37.234,26.97 C12.1@37.1,27.104 ; v1(38.5,10) 38.5,12.504 v1(39.536,13.54) v1@39.5,13.504 ; v1(41.106,26.85) 41.106,26.088 41.552,25.642 C18.2 ; C19.2 41.552,30.214 41.106,30.66 v1(41.106,31.422) 40.598,31.422 39.644,32.376 C16.2 38.82,33.2 37.804,32.184 37.804,29.39 37.364,28.95 QG1.2 36.6,28.054 37.1,27.554 C12.1@37.1,27.104 ; J1.6 43.6,14.1 v1(44,14.5) ; v1(50.5,41) J3.19
  other v1: 7.4,3 11.5,3 21.1,3 21,8 25.5,8 30.5,8 28,12.5 33,12.5 52.6,12.5 52.5,18 23.8,27.9 4,29 56,35 56,41
HSYNC: IC2.16 J2.17 | length 16.8
  Top Layer w0.305: v1(35.772,40.82) 35.772,39.746 36.796,38.722 IC2.16@36.796,36.454
  Bottom Layer w0.305: J2.17 26.8,43.7 31,43.7 33.372,41.328 35.264,41.328 v1(35.772,40.82)
MISO: IC2.32 J2.8 | length 24.9
  Top Layer w0.305: J2.8 16.5,46 16.5,42.7 20.3,38.9 25.1,38.9 27.7,36.3 27.7,33.79 29.59,31.9 IC2.32
MOSI: IC2.33 J2.6 | length 27.1
  Top Layer w0.305: J2.6 14.5,46 14.5,42.7 18.9,38.3 24.9,38.3 27.2,36 27.2,33.586 29.386,31.4 IC2.33
NetC4_1: C4.1 C5.2 IC1.25 R1.2 R2.1 | length 10.6
  Top Layer w0.305: IC1.25 15.375,13.175 v1(16.4,14.2)
  Bottom Layer w0.305: C5.2 16.65,16 C4.1 v1(16.4,14.2) 18.05,14.2 R2.1 R1.2
NetC6_2: C6.2 IC1.23 | length 5.6
  Top Layer w0.305: IC1.23 14.075,13.675 v1(14.6,14.2)
  Bottom Layer w0.305: v1(14.6,14.2) C6.2
NetC7_2: C7.2 C8.1 C9.2 IC1.21 | length 9.2
  Top Layer w0.305: IC1.21 12.775,13.875 v1(13.1,14.2)
  Bottom Layer w0.305: C9.2 11.15,16 C8.1 11.65,16 C7.2 v1(13.1,14.2)
NetC8_2: C8.2 C9.1 C10.2 IC1.20 | length 12.8
  Top Layer w0.305: v1(11.4,14.2) 11.6,14.2 12.125,13.675 IC1.20
  Bottom Layer w0.305: v1(11.4,14.2) C10.2 9.3,14.2 8.8,14.2 8.394,14.606 8.394,16.894 8.9,17.4 C9.1 11.25,17.4 C8.2
NetCON1_1: CON1.1 IC1.26 | length 5.1
  Top Layer w0.305: CON1.1 16.025,5.55 IC1.26 ccw(c16.025,10.575) IC1.26@16,10.575
NetIC2_52: IC2.52 R3.1 | length 6.6
  Top Layer w0.305: R3.1 31,18 32.8,19.8 IC2.52
NetIC2_53: IC2.53 R4.1 | length 8
  Top Layer w0.305: R4.1 30.4,16.5 33.3,19.4 IC2.53
NetIC2_54: IC2.54 R5.1 | length 9.4
  Top Layer w0.305: R5.1 29.8,15 33.8,19 IC2.54
NetIC3_9: IC3.9 J1.12 | length 21.3
  Top Layer w0.305: IC3.9 40.725,15.653 v1(41.822,14.556)
  Bottom Layer w0.305: J1.12 36,2.95 36,14.9 36.6,15.5 40.878,15.5 v1(41.822,14.556)
NetIC3_12: IC3.12 J1.11 | length 7.2
  Top Layer w0.305: J1.11 40.725,8.945 IC3.12
NetIC3_14: IC3.14 J1.10 | length 9.7
  Top Layer w0.305: J1.10 38.5,2.95 38.5,5.8 42.025,9.325 IC3.14
NetIC3_16: IC3.16 J1.8 | length 9.2
  Top Layer w0.305: J1.8 41.06,5.86 43.325,8.125 IC3.16
NetIC3_18: IC3.18 J1.7 | length 6.7
  Top Layer w0.305: J1.7 44.625,7.765 IC3.18
PCLK: IC2.18 J2.13 | length 18.5
  Top Layer w0.305: v1(30.438,41.836) 31.464,40.81 32.872,40.81 35.796,37.886 35.796,36.658 IC2.18@35.8,36.654
  Bottom Layer w0.305: J2.13 24.664,41.836 v1(30.438,41.836)
PWDN: IC2.19 J2.11 | length 20
  Top Layer w0.305: v1(30.438,40.312) 32.592,40.312 35.298,37.607 35.298,36.452 IC2.19
  Bottom Layer w0.305: J2.11 24.188,40.312 v1(30.438,40.312)
READY: IC2.27 J2.18 | length 15.5
  Top Layer w0.305: J2.18 26.5,46 26.5,41.9 v1(29.013,39.387) ; v1@29,34.9 v1(29.013,34.887) 29.5,34.4 IC2.27
  Bottom Layer w0.305: v1(29.013,34.887) v1(29.013,39.387)
RESET: IC2.25 J2.12 | length 19.1
  Top Layer w0.305: J2.12 20.5,46 20.5,42.7 23.142,40.058 25.642,40.058 29.25,36.45 IC2.25
RESET1: IC2.72 IC3.2 | length 5.7
  Top Layer w0.305: IC2.72 42.8,20.1 43.1,19.8 43.6,19.8 45.275,18.125 IC3.2
RESET2: IC2.67 IC3.11 | length 12
  Top Layer w0.305: IC3.11 39.336,11.2 38.52,12.016 38.52,14.048 39.282,14.81 39.282,18.182 40.3,19.2 IC2.67
RST: IC2.99 J2.20 | length 41.1
  Top Layer w0.305: IC2.99 47.4,34.4 53,40 53,45.5 v1(52.5,46)
  Bottom Layer w0.305: J2.20 28.5,46 v1(52.5,46)
SCL: J1.2 J2.7 | length 86.3
  Top Layer w0.305: v1(12,41.5) 12,38 v1(13,37)
  Bottom Layer w0.305: v1(12,41.5) J2.7 ; v1(13,37) 14.5,37 15,37.5 23.3,37.5 28.5,32.3 28.5,29 25.9,26.4 22.8,26.4 20.5,24.1 20.5,21 24,17.5 44.5,17.5 46,16 46,5 48.07,2.93 J1.2
SCLK: IC2.34 J2.4 | length 29.2
  Top Layer w0.305: J2.4 12.5,46 12.5,42.7 17.5,37.7 24.7,37.7 26.7,35.7 26.7,33.382 29.182,30.9 IC2.34
SDA: J1.3 J2.9 | length 82.1
  Top Layer w0.305: v1(13,40.5) 13,39 v1(14,38)
  Bottom Layer w0.305: v1(13,40.5) J2.9 ; v1(14,38) 23.8,38 29.2,32.6 29.2,28.7 26.2,25.7 23.2,25.7 21.2,23.7 21.2,21.3 24,18.5 45,18.5 47.41,16.09 J1.3
SENCLK1: IC2.71 IC3.4 | length 5
  Top Layer w0.305: IC2.71 42.3,19.8 43.975,18.125 IC3.4
SENCLK2: IC2.70 IC3.6 | length 4.7
  Top Layer w0.305: IC2.70 41.8,19.3 42.675,18.425 IC3.6
SENCLK3: IC2.68 IC3.8 | length 4.6
  Top Layer w0.305: IC2.68 40.8,19.2 41.4,18.6 41.4,17.025 IC3.8
START: IC2.24 J2.14 | length 18
  Top Layer w0.305: J2.14 22.5,46 22.5,43 24.8,40.7 25.9,40.7 28.828,37.772 32.47,37.772 32.8,37.442 IC2.24
TCK: IC2.48 P1.4 | length 39.4
  Top Layer w0.305: v1(25.1,20.5) 25.6,20.5 29,23.9 IC2.48
  Bottom Layer w0.305: v1(25.1,20.5) 49,20.5 52.55,24.05 P1.4
TDI: IC2.45 P1.2 | length 45.6
  Top Layer w0.305: v1(22.5,22.5) 23.6,22.5 23.866,22.766 25.166,22.766 27.8,25.4 IC2.45
  Bottom Layer w0.305: v1(22.5,22.5) 23.5,21.5 23.5,21.4 48.5,21.4 53.6,26.5 55.95,26.5 P1.2
TDO: IC2.83 P1.3 | length 10.6
  Top Layer w0.305: IC2.83 53.5,26.4 54.6,25.3 P1.3
TMS: IC2.47 P1.5 | length 43.1
  Top Layer w0.305: v1(23.5,20.5) 24.6,21.6 25.8,21.6 28.6,24.4 IC2.47
  Bottom Layer w0.305: v1(23.5,20.5) 24.5,19.5 49.2,19.5 52.5,22.8 P1.5
VSYNC: IC2.17 J2.15 | length 17.5
  Top Layer w0.305: v1(34.502,40.312) 36.298,38.516 IC2.17@36.298,36.452
  Bottom Layer w0.305: J2.15 25.648,42.852 30.692,42.852 33.232,40.312 v1(34.502,40.312)
pads on no net: FID1.1 FID2.1 FID3.1 FID4.1 FID5.1 FID6.1 IC2.1 IC2.2 IC2.3 IC2.4 IC2.6 IC2.7 IC2.20 IC2.28 IC2.29 IC2.55 IC2.56 IC2.58 IC2.59 IC2.60 IC2.61 IC2.63 IC2.64 IC2.65 IC2.73 IC2.74 IC2.76 IC2.77 IC2.78 IC2.79 IC2.80 IC2.81 IC2.82 IC2.85 IC2.86 IC2.87 IC2.89 IC3.3 IC3.5 IC3.7 J1.

## Polygon pours and split planes (outlines as drawn)
GND on Top Layer "Bottom Layer-No Net" (solid, pour order 6): 0,2.54 ccw(c2.54,2.54) 2.54,0 3,0 57.46,0 ccw(c57.46,2.54) 60,2.54 60,3.5 60,47.46 ccw(c57.46,47.46) 57.46,50 57,50 2.54,50 ccw(c2.54,47.46) 0,47.46 0,47 0,2.77
GND on Bottom Layer "Bottom Layer-No Net" (solid, pour order 5): 0,2.54 ccw(c2.54,2.54) 2.54,0 3,0 57.46,0 ccw(c57.46,2.54) 60,2.54 60,3.5 60,47.46 ccw(c57.46,47.46) 57.46,50 57,50 2.54,50 ccw(c2.54,47.46) 0,47.46 0,47 0,2.77

## Other copper
Top Layer:
  text "Top Layer" at 55.281,8.6 h0.71 r90
  text "200511-000" at 56.5,8.6 h0.71 r90
  text "LISC Rev. A" at 57.491,8.6 h0.71 r90
Bottom Layer:
  text "eptecon" at 54.697,8.575 h0.71 r270
  text "200511-000" at 55.687,8.575 h0.71 r270
  text "LISC Rev. A" at 56.906,8.575 h0.71 r270

## Text inside footprints (layer, text, board x,y; h text height)
P1: Top Overlay "1" at 54.878,30.498 h1.02 r270